# Altium PCB A3000_8MB.pcbdoc (part 2 of 3)
Units mil, origin at the board's own origin, x right, y up, seen from the top; angles counter-clockwise.
Board outline 6950 x 3881 mil, 4 copper layers (TopLayer, GND, VCC, BottomLayer), stack 70.897 mil thick; 83 components, 216 nets, 829 pads, 490 vias.
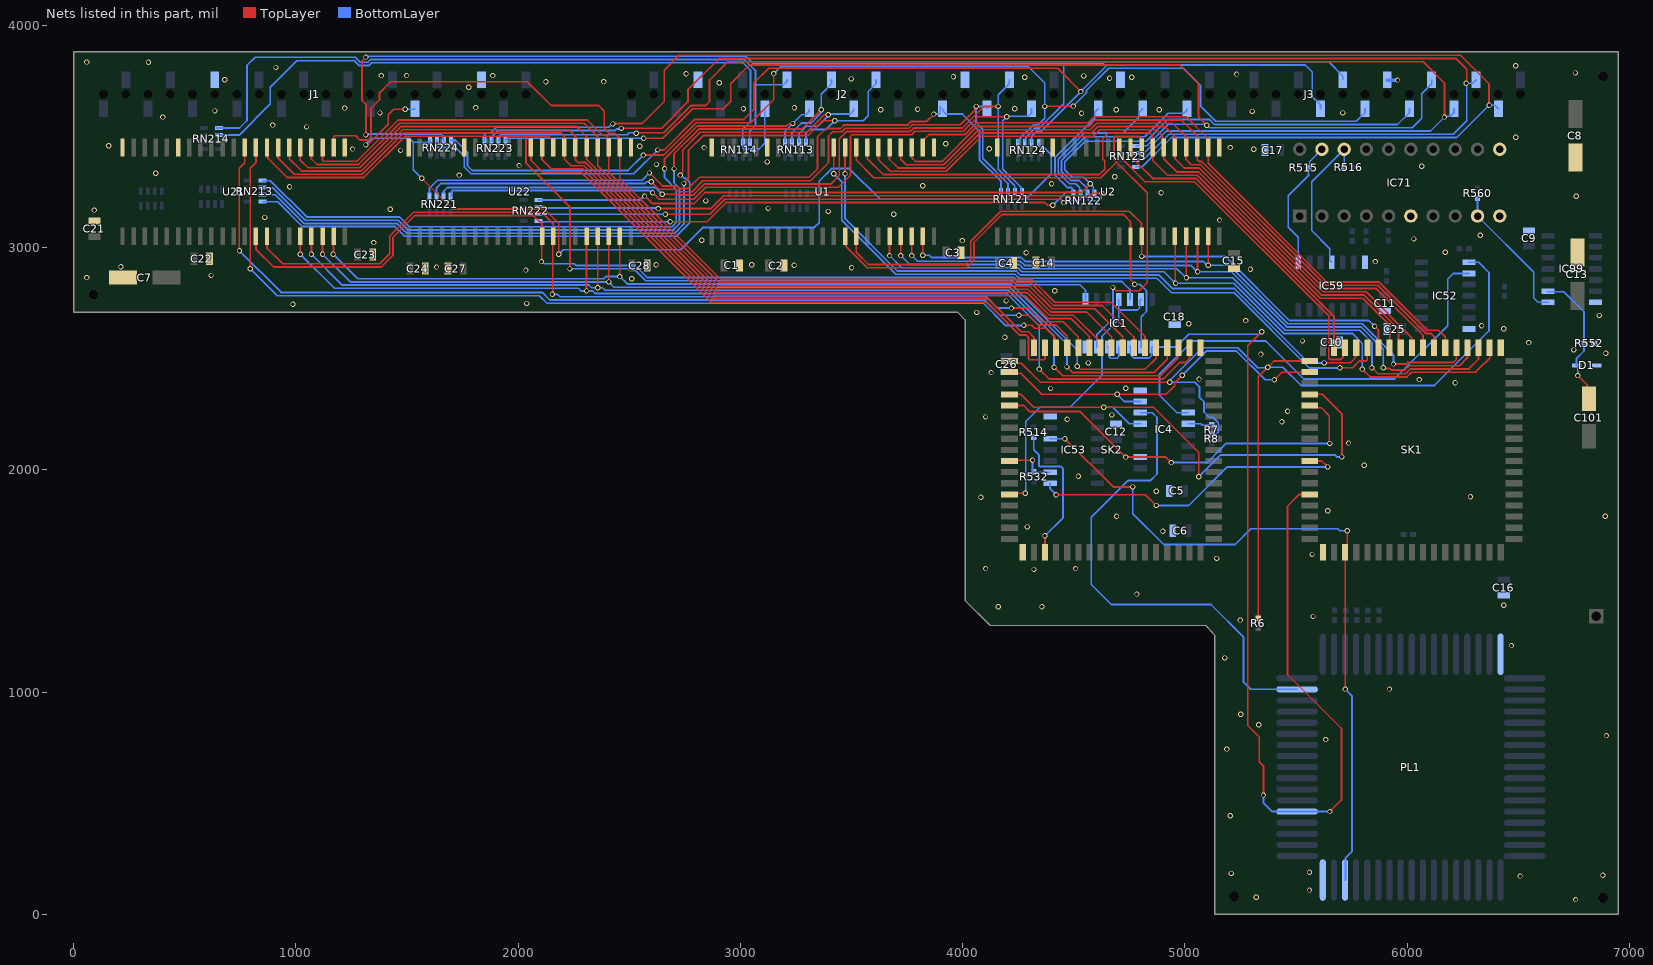
[diagram p4: the nets of this part, all layers, seen from the top]

## Via types
v1: diameter 23.62, hole 15.75, TopLayer to BottomLayer, tented both sides, 490 vias

## Nets (pads, with @x,y where several pads share a name; then routed paths per layer and width w, separated by ;. In a path a pad name is that pad's centre, name@x,y a point inside that pad or via, vN(x,y) a via of type N, cw(c..) or ccw(c..) an arc to the next point about the centre after c; other vN are vias at no path point) (continued)
D10: J2.8 RN114.8 RN214.5 | length 3225.3
  BottomLayer w7.87: RN214.5@643.05,3538.35 746.39,3538.35 780,3571.95 780,3820 817,3857 1267.28,3857 1289.72,3834.56 1323.84,3834.56 1335.97,3846.69 3017.79,3846.69 3067.82,3796.66 3067.82,3732.74 ; RN114.8@3042.24,3474.02 3042.24,3524.03 3067.82,3549.61 3067.82,3732.74 ; J2.8@3210,3754.96 3210,3748.88 3193.86,3732.74 3067.82,3732.74
D11: J2.7 RN114.7 RN214.6 | length 3235.1
  BottomLayer w7.87: RN214.6@651.43,3506.37 744.67,3506.37 885.16,3646.86 885.16,3722.44 1003.44,3840.73 1262.95,3840.73 1283.68,3819.99 1329.87,3819.99 1342.01,3832.13 3011.76,3832.13 3045.24,3798.64 3045.24,3567.8 3010.75,3533.31 RN114.7@3010.75,3474.02 3010.75,3448.61 3015.36,3444 3083.6,3444 3110,3470.4 J2.7@3110,3625.04
D12: J2.9 RN113.5 RN213.5 | length 3115
  TopLayer w7.87: v1(2658.86,3355.42) 2658.86,3400.01 2806.73,3547.87 3208.69,3547.87 3216.58,3555.77 3233.24,3555.77 v1(3236.25,3558.78)
  BottomLayer w7.87: RN213.5@848.96,3301.26 885.16,3301.26 1048.07,3138.35 1466.21,3138.35 1510.07,3094.49 2692.6,3094.49 2711.55,3113.44 2711.55,3261.5 2658.86,3314.2 v1(2658.86,3355.42) ; RN113.5@3200.61,3474.02 3200.61,3523.14 v1(3236.25,3558.78) 3275.03,3597.55 3293.86,3597.55 3310,3613.7 J2.9@3310,3625.04
D13: J2.10 RN113.6 RN213.6 | length 3415.8
  TopLayer w7.87: v1(2701.35,3354.31) 2701.35,3421.69 2812.97,3533.31 3276.23,3533.31 v1(3363.42,3620.49)
  BottomLayer w7.87: RN213.6@848.96,3269.76 896.05,3269.76 1042.04,3123.78 1460.18,3123.78 1504.03,3079.92 2698.64,3079.92 2726.12,3107.4 2726.12,3267.54 2701.35,3292.31 v1(2701.35,3354.31) ; RN113.6@3232.11,3474.02 3232.11,3517.37 3275.03,3560.3 3317.77,3560.3 3361.86,3604.39 3361.86,3618.94 v1(3363.42,3620.49) 3363.42,3691.05 3410,3737.64 J2.10@3410,3754.96
D14: J2.12 RN113.8 RN213.7 | length 3564.2
  TopLayer w7.87: v1(2746.02,3289.04) 2746.02,3291.68 2765.94,3311.6 2765.94,3437.04 2833.07,3504.17 3303.9,3504.17 3371.23,3571.5 v1(3424.93,3571.5)
  BottomLayer w7.87: RN213.7@848.96,3238.27 906.95,3238.27 1036,3109.21 1454.14,3109.21 1498,3065.35 2704.67,3065.35 2746.02,3106.7 v1(2746.02,3289.04) ; RN113.8@3295.1,3474.02 3295.1,3514.26 3312,3531.16 3384.59,3531.16 v1(3424.93,3571.5) ; v1@3428.54,3571.5 3552.61,3571.5 3575.04,3593.93 3575.04,3702.68 3610,3737.64 J2.12@3610,3754.96
D15: J2.11 RN113.7 RN213.8 | length 3427.6
  TopLayer w7.87: v1(2729.23,3326.43) 2729.23,3330.7 2740.68,3342.14 2740.68,3439.37 2820.04,3518.74 3297.87,3518.74 3376.68,3597.55 v1(3395.41,3597.55)
  BottomLayer w7.87: RN213.8@848.96,3206.77 917.84,3206.77 1029.96,3094.65 1445.85,3094.65 1489.71,3050.79 2710.71,3050.79 2772.34,3112.42 2772.34,3294.46 2755.31,3311.49 2747.69,3311.49 2732.74,3326.43 v1(2729.23,3326.43) ; RN113.7@3263.6,3474.02 3263.6,3512.11 3297.23,3545.73 3347.08,3545.73 3383.72,3582.37 3395.41,3594.06 v1(3395.41,3597.55) 3399.67,3597.55 3403.42,3601.3 3493.86,3601.3 3510,3617.44 J2.11@3510,3625.04
D16: J2.15 RN121.5 RN221.5 | length 3167.7
  TopLayer w7.87: v1(2590.82,3336.28) 2649.94,3277.17 2714.39,3277.17 2724.95,3266.6 2765.94,3266.6 2816.11,3316.77 3308.79,3316.77 3347,3354.98 3347,3498.27 3384.85,3536.12 3450.32,3536.12 3466.43,3552.23 3752.24,3552.23 3767.97,3567.95 3837.79,3567.95 v1(3870.84,3601)
  BottomLayer w7.87: RN221.5@1601.59,3244.65 1601.59,3268.14 1636.92,3303.47 2558.01,3303.47 v1(2590.82,3336.28) ; v1(3870.84,3601) 3893.86,3601 3899.1,3606.24 J2.15@3899.1,3635.29 ; J2.15@3910,3625.04 3910,3617.14 3926.14,3601 3999,3601 4075.35,3524.65 4075.35,3396.22 4172.76,3298.82 RN121.5@4172.76,3240.62
D17: J2.17 RN121.6 RN221.6 | length 3224.7
  TopLayer w7.87: v1(2598.62,3296.74) 2632.77,3262.6 2708.35,3262.6 2718.92,3252.04 2782.75,3252.04 2831.21,3300.5 3315.12,3300.5 3396.33,3381.71 3396.33,3502.11 3415.77,3521.55 3456.36,3521.55 3472.46,3537.66 3758.28,3537.66 3773.06,3552.45 3988.22,3552.45 4058.04,3622.27 4058.04,3632.27 v1(4061.06,3635.29)
  BottomLayer w7.87: RN221.6@1633.09,3244.65 1633.09,3269.72 1652.27,3288.9 2571.06,3288.9 2578.91,3296.74 v1(2598.62,3296.74) ; J2.17@4110,3625.04 4099.75,3635.29 v1(4061.06,3635.29) 4060,3634.23 4060,3563.23 4089.92,3533.31 4089.92,3402.26 4203.9,3288.28 RN121.6@4203.9,3241.7
D18: J2.19 RN121.8 RN221.8 | length 3321.4
  TopLayer w7.87: v1(2604.87,3247.13) 2634.28,3217.72 2789.63,3217.72 2843.28,3271.36 3441.11,3271.36 3495,3325.25 3495,3500.62 3502.9,3508.53 3770.34,3508.53 3785.13,3523.31 4003.01,3523.31 4068.83,3589.13 v1(4198.62,3589.13)
  BottomLayer w7.87: RN221.8@1694.88,3229.41 1699.8,3234.33 1699.8,3251.99 1704.42,3256.6 2591.14,3256.6 2600.61,3247.13 v1(2604.87,3247.13) ; RN121.8@4268.34,3246.61 4262.32,3252.63 4262.32,3271.06 4179.86,3353.52 4179.86,3570.38 4201.06,3591.57 4293.86,3591.57 4310,3607.72 J2.19@4310,3625.04
D19: J2.18 RN121.7 RN221.7 | length 3344.3
  TopLayer w7.87: v1(2648.42,3240.16) 2710.19,3240.16 2712.88,3237.47 2788.78,3237.47 2837.24,3285.93 3406.32,3285.93 3444.91,3324.52 3444.91,3490.21 3456.3,3501.6 3457,3501.6 3478.5,3523.09 3764.31,3523.09 3779.1,3537.88 3996.98,3537.88 4094.38,3635.29 v1(4160.35,3635.29)
  BottomLayer w7.87: RN221.7@1664.59,3244.65 1664.59,3253.51 1682.25,3271.17 2617.41,3271.17 v1(2648.42,3240.16) ; J2.18@4210,3754.96 4210,3737.64 4160.35,3687.99 v1(4160.35,3635.29) 4160.35,3352.42 4234.37,3278.41 RN121.7@4234.37,3249.65
D20: J3.1 RN122.5 RN222.8 | length 2962.8
  TopLayer w7.87: v1(2683.31,3116.93) 2849.38,3116.93 2935.47,3203.02 4369.23,3203.02 4381.93,3190.32 v1(4405.64,3190.32)
  BottomLayer w7.87: RN222.8@2101.28,3116.93 v1(2683.31,3116.93) ; v1(4405.64,3190.32) 4464.57,3249.25 RN122.5@4492.83,3249.25 ; RN122.5@4497.76,3244.33 RN122.5@4492.83,3249.25 ; J3.1@4610,3625.04 4593.86,3608.9 4593.86,3582.97 4415,3404.12 4415,3327.09 4470.95,3271.13 4488.22,3271.13 4492.83,3266.52 RN122.5@4492.83,3249.25
D21: J3.3 RN122.6 RN222.7 | length 3202.8
  TopLayer w7.87: v1(2662.39,3150.28) 2862.14,3150.28 2929.44,3217.58 4440.43,3217.58 v1(4455,3203.02)
  BottomLayer w7.87: RN222.7@2091.16,3150.28 v1(2662.39,3150.28) ; v1(4455,3203.02) 4474.16,3203.02 4482.01,3210.87 4522.86,3210.87 4529.25,3217.26 RN122.6@4529.25,3244.33 4526.93,3246.65 4526.93,3269.25 4508.74,3287.44 4480.55,3287.44 4429.57,3338.42 4429.57,3397.89 4547.98,3516.3 4721.68,3516.3 4793.86,3588.48 4793.86,3608.9 J3.3@4810,3625.04
D22: J3.15 RN122.8 RN222.5 | length 4448.6
  TopLayer w7.87: v1(2568.49,3232.08) 2571.2,3232.08 2604.87,3198.41 2790.92,3198.41 2840.45,3247.94 4534.84,3247.94 v1(4574.33,3287.44)
  BottomLayer w7.87: RN222.5@2091.1,3214.15 2547.44,3214.15 2565.37,3232.08 v1(2568.49,3232.08) ; RN122.8@4592.24,3244.33 4587.32,3249.25 4587.32,3274.44 v1(4574.33,3287.44) 4545.2,3316.57 4492.62,3316.57 4458.7,3350.49 4458.7,3385.82 4551.89,3479.01 4825.76,3479.01 4923.76,3577.01 5109.48,3577.01 5132.42,3554.07 5956.35,3554.07 6010,3607.72 J3.15@6010,3625.04
D23: J3.5 RN122.7 RN222.6 | length 3570
  TopLayer w7.87: v1(2630.24,3175.77) 2867.02,3175.77 2924.62,3233.37 4574.39,3233.37 4585.35,3244.33 v1(4626.7,3244.33)
  BottomLayer w7.87: RN222.6@2091.1,3182.66 2094.98,3178.78 2627.22,3178.78 v1(2630.24,3175.77) ; v1(4626.7,3244.33) 4623.68,3241.32 4623.68,3221.26 4613.29,3210.87 4569.16,3210.87 4564.54,3215.48 4564.54,3240.53 4557.65,3247.42 4557.65,3268.77 4524.42,3302 4486.58,3302 4444.13,3344.45 4444.13,3391.86 4551.13,3498.85 4818.85,3498.85 4924.43,3604.43 4993.86,3604.43 5010,3620.58 J3.5@5010,3625.04
D24: J3.12 RN124.6 RN224.7 | length 5626.6
  TopLayer w7.87: v1(1314.92,3507.06) 1314.92,3644.97 1297.78,3662.11 1297.78,3840.23 v1(1314.92,3857.38)
  BottomLayer w7.87: v1(1314.92,3507.06) 1317.93,3510.07 1326.49,3510.07 1327.41,3510.98 1653.04,3510.98 1661.57,3502.45 1661.57,3487.56 RN224.7@1666.5,3482.64 ; v1(1314.92,3857.38) 1317.93,3860.39 1326.62,3860.39 1327.49,3861.26 3024.37,3861.26 3056.07,3829.57 4455,3829.57 ; RN124.6@4279.25,3480.98 4283.7,3485.43 4283.7,3495.21 4327.31,3538.82 4345.65,3538.82 4455,3648.17 4455,3829.57 ; J3.12@5710,3754.96 5710,3772.28 5646.16,3836.12 4638.25,3836.12 4631.7,3829.57 4455,3829.57
D25: J3.11 RN124.7 RN224.6 | length 4929.6
  TopLayer w7.87: v1(2627.22,3439.37) 2657.03,3439.37 2794.66,3577.01 3016.01,3577.01 3061,3622 3061,3741.37 3126.62,3806.98 4426.86,3806.98 v1(4531.34,3702.51)
  BottomLayer w7.87: RN224.6@1635,3482.64 1635,3456.67 1641.35,3450.32 1718.82,3450.32 1757.61,3411.54 1757.61,3362.73 1787.74,3332.6 2520.45,3332.6 v1(2627.22,3439.37) ; RN124.7@4310.75,3472.13 4310.75,3501.65 4333.35,3524.25 4353.49,3524.25 4531.34,3702.1 v1(4531.34,3702.51) ; v1@4532.31,3702.51 4532.31,3703.48 4650.38,3821.55 5541.61,3821.55 5572.8,3790.37 5572.8,3679.57 5610,3642.36 J3.11@5610,3625.04
D26: J3.13 RN124.5 RN224.8 | length 5093.3
  TopLayer w7.87: v1(2562.83,3416.72) 2654.97,3416.72 2800.69,3562.44 3046.17,3562.44 3150.43,3666.7 3150.43,3782.47 v1(3149.9,3783) ; v1(4369.23,3635.29) 4369.98,3636.03 4497.01,3636.03 v1(4497.76,3636.78)
  BottomLayer w7.87: RN224.8@1697.99,3482.64 1718.26,3482.64 1772.18,3428.72 1772.18,3368.76 1793.77,3347.17 2493.93,3347.17 2562.83,3416.07 v1(2562.83,3416.72) ; v1(3149.9,3783) 3181.9,3815 4294.8,3815 4369.23,3740.56 v1(4369.23,3635.29) 4369.14,3635.19 4369.14,3582.91 4339.62,3553.39 4318.9,3553.39 4259.76,3494.25 4259.76,3490.52 4255.15,3485.91 4252.68,3485.91 4247.76,3480.98 RN124.5@4247.76,3472.13 ; v1(4497.76,3636.78) 4497.76,3637.19 4557.08,3696.51 4557.08,3707.65 4656.42,3806.98 4991.91,3806.98 5070.31,3728.58 5070.31,3636.78 5138.45,3568.63 5770.92,3568.63 5810,3607.72 J3.13@5810,3625.04
D27: J1.15 RN124.8 RN224.5 | length 4402.7
  TopLayer w7.87: v1(1314.92,3462.18) 1319.18,3462.18 1327.06,3470.05 1330.25,3470.05 1415.59,3555.39 1415.59,3597.59 1440.73,3622.72 v1(1492.15,3622.72) ; v1@1567.51,3311.08 1704.79,3173.8 2117.64,3173.8 2182.76,3108.68 v1(2182.76,2970.54)
  BottomLayer w7.87: v1(1314.92,3462.18) 1314.92,3464.92 1342.49,3492.49 1509.57,3492.49 1528.04,3474.02 ; v1(1492.15,3622.72) 1532.68,3622.72 J1.15@1535,3625.04 ; v1@1566.19,3312.4 1528.04,3350.55 1528.04,3474.02 ; RN224.5@1603.5,3482.64 1603.5,3478.94 1598.58,3474.02 1528.04,3474.02 ; v1@2182.05,2969.94 2202.16,2990.05 2732.37,2990.05 2833.42,3091.1 3332.78,3091.1 3354.36,3112.69 3354.36,3299.99 3410.24,3355.87 3490.22,3355.87 3628.51,3217.58 4283.5,3217.58 4398.11,3332.2 4398.11,3417.99 4357.76,3458.35 4347.17,3458.35 4342.24,3463.27 RN124.8@4342.24,3472.13
  other v1: 1566.22,3312.42
D28: J3.18 RN123.7 RN223.6 | length 6451.5
  TopLayer w7.87: v1(2463.47,3536.34) 2464.79,3537.66 2645.55,3537.66 2763.71,3655.83 2763.71,3710.96 2903.45,3850.69 6220.19,3850.69 6267.39,3803.48 6267.39,3741.67 v1(6264.94,3739.21)
  BottomLayer w7.87: RN223.6@1880.43,3479.76 1885.36,3484.68 1885.36,3503.93 1908.17,3526.74 2435.91,3526.74 2442.49,3533.32 2460.46,3533.32 v1(2463.47,3536.34) ; RN123.7@4778.47,3395.36 4813.12,3395.36 4928.13,3510.37 6206.73,3510.37 6267.39,3571.03 6267.39,3736.76 v1(6264.94,3739.21) 6294.25,3739.21 J3.18@6310,3754.96
D29: J3.16 RN123.5 RN223.8 | length 5090.5
  TopLayer w7.87: v1(2563.96,3492.74) 2564.97,3491.73 2651.01,3491.73 2784.74,3625.47 2923.32,3625.47 2956.61,3658.76 2956.61,3737.91 3040.25,3821.55 4977.34,3821.55 5060.9,3737.99 5060.9,3588.16 v1(5098.1,3550.97)
  BottomLayer w7.87: RN223.8@1943.43,3479.76 1943.43,3487.82 1948.35,3492.74 v1(2563.96,3492.74) ; RN123.5@4778.47,3458.35 4829.07,3458.35 4925.64,3554.92 5094.15,3554.92 5095,3554.07 v1(5098.1,3550.97) 5099.11,3550.97 5110.58,3539.5 6023.05,3539.5 6065.05,3581.5 6065.05,3692.69 6110,3737.64 J3.16@6110,3754.96
D30: J3.17 RN123.6 RN223.7 | length 6188.6
  TopLayer w7.87: v1(2531.63,3515.22) 2533.54,3517.12 2655.8,3517.12 2778.71,3640.03 2843.36,3640.03 2860.84,3657.51 2860.84,3753.82 2943.13,3836.12 6071.84,3836.12 6167.6,3740.36 v1(6167.6,3587.64)
  BottomLayer w7.87: RN223.7@1911.93,3479.76 1916.21,3484.04 1916.21,3503.02 1921.3,3508.11 2490.79,3508.11 2499.81,3517.12 2529.73,3517.12 v1(2531.63,3515.22) ; RN123.6@4778.47,3426.85 4818.17,3426.85 4916.26,3524.93 6104.9,3524.93 v1(6167.6,3587.64) 6171.86,3587.64 6175.8,3591.57 6193.86,3591.57 6210,3607.72 J3.17@6210,3625.04
D31: J3.19 RN123.8 RN223.5 | length 6679.8
  TopLayer w7.87: v1(2426.22,3556.5) 2428.5,3558.78 2558.15,3558.78 2657.03,3657.65 2657.03,3799.03 2723.25,3865.25 6239.47,3865.25 6367.9,3736.82 v1(6367.9,3640.79)
  BottomLayer w7.87: RN223.5@1848.94,3479.76 1848.94,3507.6 1857.64,3516.3 1877.12,3516.3 1902.13,3541.31 2408,3541.31 2423.18,3556.5 v1(2426.22,3556.5) ; RN123.8@4778.47,3363.86 4807.76,3363.86 4939.7,3495.8 6222.92,3495.8 v1(6367.9,3640.79) 6394.25,3640.79 J3.19@6410,3625.04
EN1: IC59.1 IC71.19 R515.1 | length 588.9
  BottomLayer w7.87: IC59.1@5510,2934.42 5510,3046.52 5465.23,3091.28 5465.23,3233.58 5555.39,3323.74 5555.39,3353.95 5561.75,3360.31 5561.75,3387.79 IC71.19@5616.23,3442.28
EN2: IC59.4 IC71.18 R516.1 | length 699.7
  BottomLayer w7.87: IC59.4@5660,2934.42 5651.41,2943.01 5651.41,2995.55 5569.96,3076.99 5569.96,3296 IC71.18@5716.23,3442.28 R516.1@5716.23,3361.33 5721.63,3355.94 R516.1@5721.63,3361.33
ERstn: IC71.9 IC99.8 R560.1 | length 625.9
  BottomLayer w7.87: R560.1@6316.23,3222.57 IC71.9@6316.23,3142.28 6568.92,2889.59 6568.92,2773.71 6588.41,2754.22 IC99.8@6633.23,2754.22
FLBK: IC4.6 PL1.45 | length 2257.1
  BottomLayer w7.87: IC4.6@4799.78,2257.8 4852.2,2257.8 4874.38,2235.62 4874.38,1981.68 4845.65,1952.95 4744.52,1952.95 4578.46,1786.9 4578.46,1484.74 4668.87,1394.33 5117.09,1394.33 5263.7,1247.72 5263.7,1044.27 5295.18,1012.8 PL1.45@5504.41,1012.8
GND: C1.2 C2.2 C3.2 C4.2 C5.2 C6.2 C7.2 C8.2 C9.2 C10.2 C11.2 C12.2 C13.2 C14.2 C15.2 C16.2 C17.2 C18.2 C21.2 C22.2 C23.2 C24.2 C25.2 C26.2 C27.2 C28.2 D1.2 IC1.7 IC4.8 IC52.7 IC53.7 IC59.7 IC71.6 IC71.10 IC71.11 IC99.7 J1.6 J1.18 J2.4 J2.16 J3.2 J3.14 PL1.27 PL1.61 R552.2 SK1.27 SK1.61 SK2.27 SK2.61 U1.22 U1.37 U1.42 U2.22 U2.37 U2.42 U21.22 U21.37 U21.42 U22.22 U22.37 U22.42 | length 59.3
  TopLayer w15.75: C24.2@1587.01,2905.63 C24.2@1587.01,2908.46 ; C27.2@1679.29,2905.63 C27.2@1679.29,2914.09
  BottomLayer w15.75: J3.14@5909,3752.42 5910.55,3753.96 v1(5956.35,3753.96)
  other v1: 6757.63,67.14 5320.58,76.89 5560,110 6507.8,172.6 6880.42,176.69 5208.42,184.69 5560,190 5203.96,444.41 5188,744 5633.25,786.73 6896.46,804.74 5332.32,853.05 5251.26,901.08 5920.16,1014.17 5179,1154 6468.97,1210 5249.13,1324.45 5576.51,1340.83 4159.8,1384.41 4356.53,1384.41 6434.62,1391.38 4783.89,1441.28 4320.31,1552.2 4102.8,1556.08 4508.02,1556.08 5142.77,1601.85 5571.61,1620 4901.13,1724.37 4290.68,1743.54 4692.34,1791.69 6891.42,1791.69 5642,1816 4082.29,1876.78 6284.42,1878.82 4870.31,1903.78 4520.73,1971.41 5807.06,2021.57 5736.23,2120.94 5436.38,2217.08 4469.48,2227.91 4102.8,2238.6 4670.31,2247.43 5461.41,2263.96 4395.42,2366.66 4734.09,2367.95 6215.05,2391.93 6054.22,2406.38 5063.66,2408.9 4127.77,2438.03 4565.29,2481.38 5341.63,2521.02 6894,2525 6748.66,2540 6547.29,2573.23 5528.49,2580.07 4189.92,2597.26 6433.84,2635 6334.62,2648.68 5017.24,2657.96 5273,2672.07 6863.71,2695.16 4062.74,2708.79 986.8,2745.6 2039,2749 4195,2760.54 4413.8,2806 2510.95,2860.57 58.8,2865.6 618.59,2875.2 2035.29,2899.12 5294.4,2902.79 3500.29,2909.56 1633.09,2912.79 212.96,2914.64 3241.39,2921.05 2620.42,2922.74 3051.52,2922.74 5855.84,2937.38 4285,2976.97 6170.84,2979.84 1350.84,3022.99 3998.17,3031.85 2825.88,3033.75 6030.08,3039.09 6328.37,3056.12 5155.42,3124.35 860,3135.7 3690.29,3150.11 3394.93,3162.85 93.12,3169.01 1424.8,3172.6 3124.18,3176.64 2844.1,3210 6760.4,3231.75 4892.5,3246.62 971.8,3274.33 3820.29,3278.19 4400,3287.44 4683.64,3318.66 1735,3326.72 370,3334.25 6064.86,3365.87 2004.28,3369.61 2622,3374.44 3121.26,3385.39 1470.87,3437.25 5310,3442.28 1255.08,3443.86 4119.84,3445.04 2836.58,3450.32 5203.66,3450.44 2547.44,3456.05 158.58,3458.03 3923.73,3467.57 6487.99,3496.3 1048.07,3542.99 896.05,3551.68 401.55,3587.64 4534.84,3604.43 1377.98,3605.94 5710,3605.87 5303.04,3613 635.75,3615 3630.84,3620.49 4690.34,3620.58 4884.05,3620.58 3796.73,3622.27 3013.75,3625.04 4234.37,3625.04 1220.16,3627.93 3243.23,3629.15 1809,3630.56 1777.36,3721.14 2905.09,3741.97 2125,3746.7 2385.15,3747.21 680,3754.96 3498.28,3759.15 4660.57,3762.34 4279.25,3766.3 4760.75,3766.3 3958.37,3768.68 4545,3772.3 1384.01,3774 1498,3774 1885.36,3774 5232,3781 2755.31,3782.47 6756.87,3786.04 910,3811 6487.99,3818 336.46,3834.56 58.8,3835
M1ABRT: IC53.1 SK1.53 | length 1468.4
  TopLayer w7.87: v1(4420.31,1888.47) 4821.84,1888.47 v1(4870.31,1840) ; SK1.53@5561,2040 5615.62,2040 v1(5642,2013.62)
  BottomLayer w7.87: IC53.1@4393.23,1940 4393.23,1915.55 v1(4420.31,1888.47) ; v1(4870.31,1840) 5017.24,1840 5190.86,2013.62 v1(5642,2013.62)
M1DBE: IC1.1 IC1.3 PL1.56 SK1.56 | length 4808
  TopLayer w7.87: v1(5345.86,2621.15) 5282.64,2557.93 5282.64,850.39 5334.72,798.31 5334.72,687.41 5353,669.13 v1@5353,537.53 ; SK1.56@5561,1890 5514.63,1890 5461.34,1836.72 5461.34,1079.64 5704.11,836.87 5704.11,515.24 v1(5652.01,463.14)
  BottomLayer w7.87: IC1.3@4752.58,2553.23 4757.04,2548.78 4757.04,2516.01 4769.27,2503.78 4838.52,2503.78 4850.75,2516.01 4850.75,2551.4 IC1.1@4852.58,2553.23 4960.36,2553.23 5017.8,2610.67 5333.38,2610.67 5343.86,2621.15 v1(5345.86,2621.15) ; v1(5353,537) 5353,502 5392.2,462.8 PL1.56@5504.41,462.8 v1@5651.12,462.8
M1nCAS0: SK1.39 U1.31 | length 3077.1
  TopLayer w7.87: v1(3420,3332.41) 3420.42,3332.83 3420.42,3450.68 U1.31@3420.84,3451.1 ; v1(5697.2,2460.16) 5736.38,2460.16 5754.98,2460.16 5785.15,2490.34 5815.39,2490.34 5820,2494.95 SK1.39@5820,2525.18 ; SK1.39@5820,2525.18 5820.84,2526.02 SK1.39@5820.84,2549.84 5820,2549 SK1.39@5820,2525.18
  BottomLayer w7.87: v1(3420,3332.41) 3456.27,3296.14 3456.27,3123.75 3699.38,2880.65 4235.56,2880.65 4254.29,2861.93 4874.38,2861.93 4939.37,2796.94 5221.3,2796.94 5559.43,2458.81 5695.86,2458.81 v1(5697.2,2460.16)
M1nCAS1: SK1.40 U1.30 | length 2942.4
  TopLayer w7.87: v1(3470.84,3332.83) U1.30@3470.84,3451.1 ; v1(5626.93,2481.25) 5628.28,2482.6 5744.59,2482.6 5767.04,2505.04 5767.04,2546.04 SK1.40@5770.84,2549.84
  BottomLayer w7.87: v1(3470.84,3332.83) 3470.84,3129.79 3705.41,2895.22 4241.6,2895.22 4260.32,2876.49 4884.05,2876.49 4944.7,2815.84 5223,2815.84 5557.59,2481.25 v1(5626.93,2481.25)
M1nCAS2: SK1.41 U2.31 | length 1587.4
  TopLayer w7.87: U2.31@4705,3451.1 4711.06,3445.04 4711.06,3406.3 4820.39,3296.97 5042.8,3296.97 5646.43,2693.34 5646.43,2501.78 5651.05,2497.17 5701.72,2497.17 5711.45,2506.9 5711.45,2540.45 SK1.41@5720.84,2549.84
M1nCAS3: SK1.42 U2.30 | length 1394.5
  TopLayer w7.87: U2.30@4755,3451.1 4760.39,3445.71 4760.39,3405.54 4786.42,3379.52 4854.4,3311.54 5048.84,3311.54 5670.84,2689.53 SK1.42@5670.84,2549.84
M1nRAS: SK1.38 U1.14 U2.14 | length 2978.6
  TopLayer w7.87: U1.14@3520.84,3051.1 3520.84,2979.69 3576.18,2924.35 4012.48,2924.35 4036.16,2948.03 4036.16,3029.42 4170.78,3164.04 4749.85,3164.04 4805,3108.89 U2.14@4805,3051.1 4805.76,3050.34 v1(4805.76,2960.56) ; v1@5853.15,2646.74 5870.84,2629.05 SK1.38@5870.84,2549.84
  BottomLayer w7.87: v1(4805.76,2960.56) 5181.29,2960.56 5469.32,2672.52 5827.07,2672.52 v1(5853.13,2646.47)
M1OE: IC1.6 U1.29 U2.29 | length 2653
  TopLayer w7.87: U1.29@3520.84,3451.1 3520.84,3394.22 3600.41,3314.65 4621.97,3314.65 4692.02,3384.7 ; v1(4676.01,2820.98) 4690.34,2806.65 4793.66,2806.65 4830.29,2843.29 4830.29,3246.43 4692.02,3384.7 ; U2.29@4805,3451.1 4800.06,3456.04 4800.06,3497.12 4795.45,3501.73 4681.84,3501.73 4680.35,3500.24 4680.35,3396.37 4692.02,3384.7
  BottomLayer w7.87: IC1.6@4602.58,2553.23 4602.58,2607.7 4676.01,2681.13 v1(4676.01,2820.98)
M1RA0: SK1.28 U1.17 U2.17 | length 3375.7
  TopLayer w7.87: v1(3670.84,2964.5) U1.17@3670.84,3051.1 ; U2.17@4955,3051.1 4956.45,3049.65 4956.45,2841.4 v1(4957.9,2839.94) ; v1(5797.2,2453.67) 5832.52,2418.35 5999.19,2418.35 6020.84,2440 6307.8,2440 6320.39,2452.59 6370.84,2503.04 SK1.28@6370.84,2549.84
  BottomLayer w7.87: v1(3670.84,2964.5) 3725.55,2909.78 4247.63,2909.78 4266.35,2891.06 4905.88,2891.06 4931.07,2865.87 4956.99,2839.94 v1(4957.9,2839.94) ; v1@4957.9,2839.49 5219.95,2839.49 5445.19,2614.26 5752.84,2614.26 5798.13,2568.96 5798.13,2454.59 v1(5797.2,2453.67)
M1RA1: SK1.29 U1.18 U2.18 | length 3239
  TopLayer w7.87: v1(3720.84,2964.5) U1.18@3720.84,3051.1 ; U2.18@5005,3051.1 5005.76,3050.34 5005.76,2865.43 v1(5006.53,2864.66) ; v1(5841.44,2460.16) 5868.68,2432.91 5993.15,2432.91 6014.81,2454.57 6277.4,2454.57 6320.84,2498.01 SK1.29@6320.84,2549.84
  BottomLayer w7.87: v1(3720.84,2964.5) 3760.99,2924.35 4253.67,2924.35 4272.39,2905.63 4963.7,2905.63 5004.66,2864.66 5215.38,2864.66 5451.22,2628.82 5786.06,2628.82 5841.44,2573.45 v1(5841.44,2460.16)
M1RA2: SK1.30 U1.19 U2.19 | length 3077.8
  TopLayer w7.87: U1.19@3770.84,3051.1 3771,3050.95 3771,2964.65 v1(3771.15,2964.5) ; U2.19@5055,3051.1 5055.99,3050.11 5055.99,2892.05 v1(5056.98,2891.06) ; v1(5892.45,2459.29) 5894.88,2456.86 5920.01,2456.86 5927.02,2449.84 5989.48,2449.84 6008.77,2469.13 6235.94,2469.13 6270.84,2504.04 SK1.30@6270.84,2549.84
  BottomLayer w7.87: v1(3771.15,2964.5) 3796.73,2938.92 4259.7,2938.92 4278.42,2920.19 5025.54,2920.19 5054.68,2891.06 5209.58,2891.06 5457.25,2643.39 5792.09,2643.39 5892.45,2543.04 v1(5892.45,2459.29)
M1RA3: SK1.31 U1.20 U2.20 | length 2904.6
  TopLayer w7.87: v1(3820.84,2965.29) U1.20@3820.84,3051.1 ; v1(5105,2921.15) U2.20@5105,3051.1 ; v1(5937.95,2476.22) 5995.26,2476.22 6002.74,2483.7 6208.11,2483.7 6220.84,2496.43 SK1.31@6220.84,2549.84
  BottomLayer w7.87: v1(3820.84,2965.29) 3849.55,2965.29 3859.46,2955.39 4263.82,2955.39 4265.72,2953.48 4281.1,2938.12 5082.99,2938.12 5099.93,2921.18 v1(5105,2921.15) 5200.09,2921.15 5463.29,2657.96 5798.13,2657.96 5937.95,2518.14 v1(5937.95,2476.22)
M1RA4: SK1.32 U1.23 U2.23 | length 2948.7
  TopLayer w7.87: U1.23@3820.84,3451.1 3820.84,3481.1 3848.48,3508.75 4009.04,3508.75 4062.74,3562.44 4564.98,3562.44 4591.68,3589.13 5005.66,3589.13 5098.94,3495.86 5098.94,3457.17 U2.23@5105,3451.1 5105,3378.98 5639,2844.98 5873.31,2844.98 6089.47,2628.82 6140.6,2628.82 6170.84,2598.58 SK1.32@6170.84,2549.84
M1RA5: SK1.33 U1.24 U2.24 | length 2997.3
  TopLayer w7.87: U1.24@3770.84,3451.1 3771.15,3450.79 3771.15,3403.9 3787.58,3387.48 3908.38,3387.48 4066.33,3545.43 4568.58,3545.43 4597.71,3574.57 4984.01,3574.57 5055,3503.58 U2.24@5055,3451.1 5055,3396.14 5063.66,3387.48 5075.9,3387.48 5632.97,2830.41 5867.28,2830.41 6083.43,2614.26 6105.25,2614.26 6120.84,2598.66 SK1.33@6120.84,2549.84
M1RA6: SK1.34 U1.25 U2.25 | length 3002.5
  TopLayer w7.87: U1.25@3720.84,3451.1 3720.84,3397.48 3745.4,3372.91 3914.41,3372.91 4072.36,3530.87 4574.61,3530.87 4603.75,3560 4943.92,3560 5005,3498.92 U2.25@5005,3451.1 5005,3396.87 5028.96,3372.91 5069.86,3372.91 5626.93,2815.84 5861.24,2815.84 6070.84,2606.25 SK1.34@6070.84,2549.84
M1RA7: SK1.35 U1.26 U2.26 | length 2994.7
  TopLayer w7.87: U1.26@3670.84,3451.1 3670.84,3396.81 3709.3,3358.35 3920.44,3358.35 4078.4,3516.3 4580.65,3516.3 4609.78,3545.43 4908.41,3545.43 4955,3498.85 U2.26@4955,3451.1 4955,3399.98 4996.63,3358.35 5063.83,3358.35 5620.9,2801.28 5814.97,2801.28 6020.84,2595.41 SK1.35@6020.84,2549.84
M1RA8: SK1.36 U1.27 U2.27 | length 3010
  TopLayer w7.87: U1.27@3620.84,3451.1 3620.84,3396.8 3673.86,3343.78 3926.48,3343.78 4084.43,3501.73 4586.68,3501.73 4615.81,3530.87 4871.98,3530.87 4898.94,3503.91 4898.94,3457.17 U2.27@4905,3451.1 4905,3399.29 4915.57,3388.72 4963.62,3340.67 5060.9,3340.67 5614.86,2786.71 5805.85,2786.71 5961,2631.56 5961,2559.68 SK1.36@5970.84,2549.84
M1RA9: SK1.37 U1.28 U2.28 | length 3125.5
  TopLayer w7.87: U1.28@3570.84,3451.1 3570.84,3400.43 3642.05,3329.21 4614.8,3329.21 4639.01,3353.43 4639.01,3390.43 4630.08,3399.36 4630.08,3491.21 4644.77,3505.9 4645.24,3505.9 4655.63,3516.3 4841.61,3516.3 4855,3502.91 U2.28@4855,3451.1 4855,3392.3 4873.15,3374.15 4921.2,3326.11 5054.87,3326.11 5608.83,2772.14 5799.82,2772.14 5920.84,2651.12 SK1.37@5920.84,2549.84
M1WE: IC1.2 U1.13 U2.13 | length 2145.6
  TopLayer w7.87: U1.13@3470.84,3051.1 3475.31,3046.63 3475.31,3004.62 3570.15,2909.78 4018.52,2909.78 4050.73,2942 4050.73,3023.39 4176.82,3149.47 4722.5,3149.47 4755,3116.97 U2.13@4755,3051.1 4755,2856.52 4773,2838.52 v1(4773,2835.55)
  BottomLayer w7.87: v1@4773.1,2835.55 4797.45,2835.55 4827,2806 4827,2712.68 4803.82,2689.5 4803.82,2554.47 IC1.2@4802.58,2553.23
M2ABRT: IC53.2 R532.1 SK2.53 | length 232.3
  TopLayer w7.87: SK2.53@4210.47,2040 4213.93,2043.46 v1(4314.37,2043.46)
  BottomLayer w7.87: v1(4314.37,2043.46) 4314.37,1998.16 R532.1@4321.16,1991.38 ; R532.1@4321.16,1989.41 IC53.2@4393.23,1989.41
M2DBE: IC1.11 IC1.13 SK2.56 | length 1336.3
  TopLayer w7.87: SK2.56@4210.47,1890 4215.39,1894.93 v1(4281.79,1894.93)
  BottomLayer w7.87: v1(4281.79,1894.93) 4284.09,1897.23 4284.09,2217.87 4347.68,2281.46 4482.68,2281.46 4626.7,2425.47 4626.7,2601.2 4702.58,2677.09 4702.58,2719.62 ; IC1.11@4702.58,2766.77 4702.58,2719.62 ; IC1.13@4802.58,2766.77 4796.35,2760.54 4796.35,2729.55 4786.42,2719.62 4702.58,2719.62
M2nCAS0: SK2.39 U21.31 | length 4411.4
  TopLayer w7.87: v1(746,2986) 745,2987 745,3357.73 770,3382.73 U21.31@770,3451.1 ; v1(4253.25,2695.56) 4296.31,2695.56 4340.01,2651.86 4420.51,2651.86 4470.31,2602.06 SK2.39@4470.31,2549.84
  BottomLayer w7.87: v1(746,2986) 933.42,2798.58 2108.61,2798.58 2143.07,2764.11 4099.44,2764.11 4168,2695.56 v1(4253.25,2695.56)
M2nCAS1: SK2.40 U21.30 | length 4353.5
  TopLayer w7.87: v1(794.87,2905.32) 794.87,3356.97 820,3382.11 U21.30@820,3451.1 ; v1(4275.32,2650.65) 4310.42,2650.65 4323.98,2637.09 4373.41,2637.09 4415.87,2594.64 4415.87,2554.28 SK2.40@4420.31,2549.84
  BottomLayer w7.87: v1(794.87,2905.32) 916.17,2784.02 2095.26,2784.02 2129.72,2749.55 4093.41,2749.55 4193.52,2649.44 4274.11,2649.44 v1(4275.32,2650.65)
M2nCAS2: SK2.41 U22.31 | length 2850.9
  TopLayer w7.87: U22.31@2057.64,3451.1 2057.64,3392.8 2110.7,3339.74 2284.03,3339.74 2868.89,2754.88 4108.68,2754.88 4256.86,2606.7 4285.64,2606.7 4290.27,2602.06 4290.68,2602.06 4295.9,2596.85 4295.9,2500.11 4300.51,2495.5 4365.7,2495.5 4370.31,2500.11 SK2.41@4370.31,2549.84
M2nCAS3: SK2.42 U22.30 | length 2646
  TopLayer w7.87: U22.30@2107.64,3451.1 2107.64,3396.15 2149.48,3354.31 2290.07,3354.31 2874.93,2769.45 4114.71,2769.45 4262.9,2621.26 4296.31,2621.26 4320.31,2597.26 SK2.42@4320.31,2549.84
M2nRAS: SK2.38 U21.14 U22.14 | length 4347.3
  TopLayer w7.87: U21.14@870,3051.1 870,2998.03 940.67,2927.36 1377.98,2927.36 1422.59,2971.98 1422.59,3052.59 1529.23,3159.23 2105.77,3159.23 2157.64,3107.36 U22.14@2157.64,3051.1 2155.82,3049.28 2155.82,2792.31 v1(2154,2790.49) ; v1(4219.06,2728.5) 4295.86,2728.5 4357.94,2666.43 4451.8,2666.43 4520.31,2597.92 SK2.38@4520.31,2549.84
  BottomLayer w7.87: v1(2154,2790.49) 2176.28,2790.49 2188.09,2778.68 4105.48,2778.68 4155.65,2728.5 v1(4219.06,2728.5)
M2OE: IC1.8 U21.29 U22.29 | length 4568.3
  TopLayer w7.87: U21.29@870,3451.1 872.07,3449.03 872.07,3403.9 960.34,3315.64 1306.06,3315.64 1492.15,3501.73 2036.22,3501.73 ; U22.29@2157.64,3451.1 2157.64,3481.1 2137.01,3501.73 2036.22,3501.73 ; v1(2233,2904) 2233.54,2904.54 2233.54,3182.66 2035,3381.2 2035,3500.51 2036.22,3501.73
  BottomLayer w7.87: v1(2233,2904) 2234.32,2905.32 2519.69,2905.32 2573.49,2851.51 4223.5,2851.51 4242.22,2832.79 4527.98,2832.79 4552.58,2808.19 IC1.8@4552.58,2766.77
M2RA0: SK2.28 U21.17 U22.17 | length 4759
  TopLayer w7.87: v1(1020,2970.67) U21.17@1020,3051.1 ; v1(2307.64,2805.06) U22.17@2307.64,3051.1 ; v1(4345,2453.78) 4389.89,2408.89 4902.51,2408.89 4976.93,2483.31 5001.06,2483.31 5020.31,2502.55 SK2.28@5020.31,2549.84
  BottomLayer w7.87: v1(1020,2970.67) 1173.8,2816.87 2271.3,2816.87 2283.11,2805.06 v1@2307.34,2805.06 ; v1@2307.34,2804.76 2335.2,2804.76 2346.71,2793.25 4199.36,2793.25 4345,2647.61 v1(4345,2453.78)
M2RA1: SK2.29 U21.18 U22.18 | length 4599.1
  TopLayer w7.87: v1(1070,2970.67) U21.18@1070,3051.1 ; v1(2357.64,2819.63) U22.18@2357.64,3051.1 ; v1(4411.25,2461.53) 4449.32,2423.46 4888.3,2423.46 4969.89,2505.04 4969.89,2549.42 SK2.29@4970.31,2549.84
  BottomLayer w7.87: v1(1070,2970.67) 1209.23,2831.44 2318.56,2831.44 2330.08,2819.92 2357.34,2819.92 v1(2357.64,2819.63) ; v1@2358.32,2818.95 2359,2819.63 2379.37,2819.63 2391.19,2807.81 4205.4,2807.81 4411.25,2601.96 v1(4411.25,2461.53)
M2RA2: SK2.30 U21.19 U22.19 | length 4442.1
  TopLayer w7.87: v1(1120,2970.67) U21.19@1120,3051.1 ; v1(2407.64,2846) U22.19@2407.64,3051.1 ; v1(4469.06,2463.48) 4494.52,2438.03 4859.76,2438.03 4920.31,2498.58 SK2.30@4920.31,2549.84
  BottomLayer w7.87: v1(1120,2970.67) 1244.66,2846 v1(2407.64,2846) 2431.26,2822.38 4211.43,2822.38 4469.06,2564.75 v1(4469.06,2463.48)
M2RA3: SK2.31 U21.20 U22.20 | length 4300
  TopLayer w7.87: v1(1167.39,2970.67) 1168.69,2971.97 1168.69,3028.69 1167.39,3030 1170,3032.61 U21.20@1170,3051.1 ; v1(2457.64,2870) U22.20@2457.64,3051.1 ; v1(4514.99,2466.05) 4528.45,2452.59 4820.39,2452.59 4870.31,2502.51 SK2.31@4870.31,2549.84
  BottomLayer w7.87: v1(1167.39,2970.67) 1277.49,2860.57 2385.15,2860.57 2394.58,2870 v1(2457.64,2870) 2490.69,2836.95 4217.46,2836.95 4514.99,2539.42 v1(4514.99,2466.05)
M2RA4: SK2.32 U21.23 U22.23 | length 4588
  TopLayer w7.87: U21.23@1170,3451.1 1170,3498.38 1174.61,3502.99 1269.07,3502.99 1287.44,3484.62 1324.22,3484.62 1337.98,3498.38 1337.98,3628.02 1376.69,3666.73 1376.69,3697.72 1425.66,3746.7 2041.19,3746.7 2148.4,3639.49 2361.89,3639.49 2386.91,3614.46 2386.91,3536.76 2409.79,3513.88 2435.91,3513.88 2452.69,3497.11 2452.69,3456.05 U22.23@2457.64,3451.1 2457.64,3311.08 2630.24,3138.48 2630.24,3137.74 2911.13,2856.85 4311.83,2856.85 4413.8,2754.88 4667.32,2754.88 4820.31,2601.9 SK2.32@4820.31,2549.84
M2RA5: SK2.33 U21.24 U22.24 | length 4331.2
  TopLayer w7.87: U21.24@1120,3451.1 1120,3393.08 1124.61,3388.47 1275.22,3388.47 1461.32,3574.57 2310.92,3574.57 2377.38,3508.11 2394.96,3508.11 2401.57,3501.49 2401.57,3457.17 U22.24@2407.64,3451.1 2407.64,3339.74 2905.09,2842.28 4305.8,2842.28 4408.37,2739.71 4628.59,2739.71 4770.31,2597.99 SK2.33@4770.31,2549.84
M2RA6: SK2.34 U21.25 U22.25 | length 4313.8
  TopLayer w7.87: U21.25@1070,3451.1 1070,3398.86 1094.95,3373.9 1281.25,3373.9 1467.35,3560 2297.36,3560 2357.64,3499.72 2357.64,3369.14 2899.06,2827.72 4299.77,2827.72 4402.33,2725.15 4594.41,2725.15 4720.31,2599.25 SK2.34@4720.31,2549.84
M2RA7: SK2.35 U21.26 U22.26 | length 4299
  TopLayer w7.87: U21.26@1020,3451.1 1020,3393.86 1054.52,3359.34 1287.29,3359.34 1473.38,3545.43 2262.2,3545.43 2307.64,3500 2307.64,3398.54 2893.03,2813.15 4293.73,2813.15 4396.3,2710.58 4557.72,2710.58 4569.05,2699.25 4670.31,2597.99 SK2.35@4670.31,2549.84
M2RA8: SK2.36 U21.27 U22.27 | length 4283.6
  TopLayer w7.87: U21.27@970,3451.1 970,3400.8 1026.03,3344.77 1293.32,3344.77 1479.42,3530.87 2228.32,3530.87 2257.64,3501.55 U22.27@2257.64,3451.1 2257.78,3450.96 2257.78,3394.86 2269.2,3383.44 2302.13,3383.44 2886.99,2798.58 4287.7,2798.58 4390.72,2695.56 4498.41,2695.56 4620.31,2573.66 SK2.36@4620.31,2549.84
M2RA9: SK2.37 U21.28 U22.28 | length 4295.6
  TopLayer w7.87: U21.28@920,3451.1 920,3402.11 991.9,3330.2 1299.35,3330.2 1485.45,3516.3 2192.88,3516.3 2207.64,3501.55 2207.64,3398.88 2237.64,3368.87 2296.1,3368.87 2880.96,2784.02 4281.66,2784.02 4384.69,2680.99 4488.57,2680.99 4570.31,2599.25 SK2.37@4570.31,2549.84
M2WE: IC1.12 U21.13 U22.13 | length 4451.4
  TopLayer w7.87: U21.13@820,3051.1 820,2993 900.21,2912.79 1384.01,2912.79 1437.16,2965.94 1437.16,3046.56 1535.27,3144.67 2067.57,3144.67 2107.64,3104.6 U22.13@2107.64,3051.1 2106.32,3049.78 2106.32,2938.94 v1(2105,2937.62)
  BottomLayer w7.87: v1(2105,2937.62) 2107,2937.62 2117.49,2927.14 2251.97,2927.14 2259.23,2919.88 2525.72,2919.88 2579.52,2866.08 4229.53,2866.08 4248.25,2847.36 4716.66,2847.36 4752.58,2811.44 IC1.12@4752.58,2766.77
MFLBK: IC4.7 SK1.45 SK2.45 | length 1665.6
  TopLayer w7.87: SK2.45@4210.47,2440 4215.34,2435.13 4260.5,2435.13 4355.63,2340 4914.56,2340 4953.51,2378.95 4953.51,2391.77 v1(4988.11,2426.37) ; v1(5402.64,2405.91) 5436.72,2440 SK1.45@5561,2440
  BottomLayer w7.87: v1(4695,2340) 4718.07,2316.93 4727.2,2307.8 IC4.7@4799.78,2307.8 ; v1(4988.11,2426.37) 5096.3,2534.57 5232.01,2534.57 5360.66,2405.91 v1(5402.64,2405.91)
MnBW: R514.1 SK2.63 | length 662.3
  TopLayer w7.87: SK2.63@4370.31,1630.16 v1(4370.31,1703.78)
  BottomLayer w7.87: R514.1@4320,2148.35 4320,2091.29 4342.81,2068.48 4342.81,2019.61 4347.42,2015 4442.63,2015 4451.74,2005.89 4451.74,1785.21 v1(4370.31,1703.78)
MnSDRQ: IC4.5 SK1.47 SK2.47 | length 2334
  TopLayer w7.87: SK2.47@4210.47,2340 4261.48,2340 4320.02,2281.46 v1(4634.09,2281.46) 4858.54,2281.46 5061.5,2078.5 v1(5061.5,1969.72) ; SK1.47@5561,2340 5616.94,2340 5707.06,2249.87 5707.06,2059.3 v1(5706.38,2058.62)
  BottomLayer w7.87: v1(4634.09,2281.46) 4675.69,2281.46 4749.35,2207.8 IC4.5@4799.78,2207.8 ; v1@5056.98,1965.2 5158.41,2066.63 5675.45,2066.63 5683.43,2058.66 v1(5706.38,2058.62) v1(5706.38,2058.62)
MnVDRQ: IC4.2 SK1.48 SK2.48 | length 1882.3
  TopLayer w7.87: SK2.48@4210.47,2290 4274.33,2290 4301.91,2262.42 4529.2,2262.42 v1(4733.82,2057.8) 4913.93,2057.8 v1(4938.34,2033.39) ; SK1.48@5561,2290 5570.84,2280.16 5614.11,2280.16 5649.72,2244.55 v1@5649.72,2118.76
  BottomLayer w7.87: v1(4733.82,2057.8) IC4.2@4799.78,2057.8 ; v1(4938.34,2033.39) 5099.75,2033.39 5185.75,2119.39 5217.19,2119.39 5217.58,2118.99 v1(5651.41,2118.99)
MRST: IC52.1 R6.2 R7.2 R8.1 SK1.44 SK2.44 | length 4579.7
  TopLayer w7.87: SK2.44@4210.47,2490 4220.31,2480.16 4264.31,2480.16 4350.14,2394.33 v1(4931.07,2394.33) ; R6.2@5330,1331.65 5330,2419.31 v1(5372.22,2461.53) 5400.69,2490 SK1.44@5561,2490
  BottomLayer w7.87: v1(4931.07,2394.33) 4936.59,2399.84 4936.59,2399.72 4941.98,2394.33 5044.16,2394.33 5065,2373.49 5065,2327.41 5085.86,2306.55 5085.86,2260.47 5109.71,2236.62 5125.75,2236.62 5149.6,2212.78 5149.6,2170.32 5139.69,2160.41 5120,2160.41 R7.2@5120,2158.44 ; v1@4935.04,2401.39 4935.04,2405.04 5079.13,2549.13 5238.04,2549.13 5327.02,2460.16 5370.85,2460.16 v1(5372.22,2461.53) 5440.69,2461.53 5522.46,2379.76 6122.17,2379.76 6367.9,2625.49 6367.9,2887.88 6321.84,2933.94 IC52.1@6277.61,2933.94
MRSTn: IC4.11 IC52.2 | length 2100.8
  BottomLayer w7.87: IC4.11@5014.35,2257.8 4964.29,2257.8 4884.92,2337.17 4884.92,2429.77 5035.22,2580.07 5363.35,2580.07 5534.52,2408.9 5942.38,2408.9 6182.17,2648.68 6182.17,2859.08 6207.03,2883.94 IC52.2@6277.61,2883.94
MRSTx: IC4.12 R7.1 | length 108.2
  BottomLayer w7.87: IC4.12@5014.35,2207.8 5070.92,2207.8 5076.97,2201.75 R7.1@5120,2201.75
nBW: IC53.5 PL1.63 SK1.63 | length 3240.7
  TopLayer w7.87: v1(4460,2140.73) 4677.24,1923.49 v1(4765.38,1923.49) ; v1@5720.84,1012.37 v1(5720.84,1014.17) SK1.63@5720.84,1630.16 5729.66,1638.98 v1(5729.66,1726.22)
  BottomLayer w7.87: IC53.5@4393.23,2140 4459.27,2140 v1(4460,2140.73) ; v1(4765.38,1923.49) 4765.38,1803.54 4904.58,1664.34 5225.52,1664.34 5296.57,1735.39 5687.54,1735.39 5696.7,1726.22 v1(5729.66,1726.22) ; PL1.63@5720.16,154.92 5721.8,156.57 5721.8,253.44 5751.24,282.87 5751.24,983.77 v1(5720.84,1014.17) v1@5720.84,1013.27
NetC101_2: C101.2 D1.1 IC99.9 R552.1 | length 635
  TopLayer w7.87: v1(6766.77,2424.72) 6809.22,2382.27 6809.22,2343.51 6820.25,2332.49 C101.2@6807.72,2319.96
  BottomLayer w7.87: IC99.9@6633.23,2804.22 6635.98,2801.47 6704.91,2801.47 6795.43,2710.95 6795.43,2570 6795.43,2535.11 6761.97,2501.64 D1.1@6761.97,2470 6766.77,2465.2 v1(6766.77,2424.72)
NetIC1_4: IC1.4 IC1.5 | length 139
  BottomLayer w7.87: IC1.5@4652.58,2553.23 4656.81,2549 4656.81,2511.96 4666.26,2502.51 4695,2502.51 4702.58,2510.1 IC1.4@4702.58,2553.23